# Altium PCB power.PcbDoc
Units mil, origin at the board's own origin, x right, y up, seen from the top; angles counter-clockwise.
Board outline 6000 x 4000 mil, 2 copper layers (Top Layer, Bottom Layer); 12 components, 10 nets, 44 pads, 16 vias.
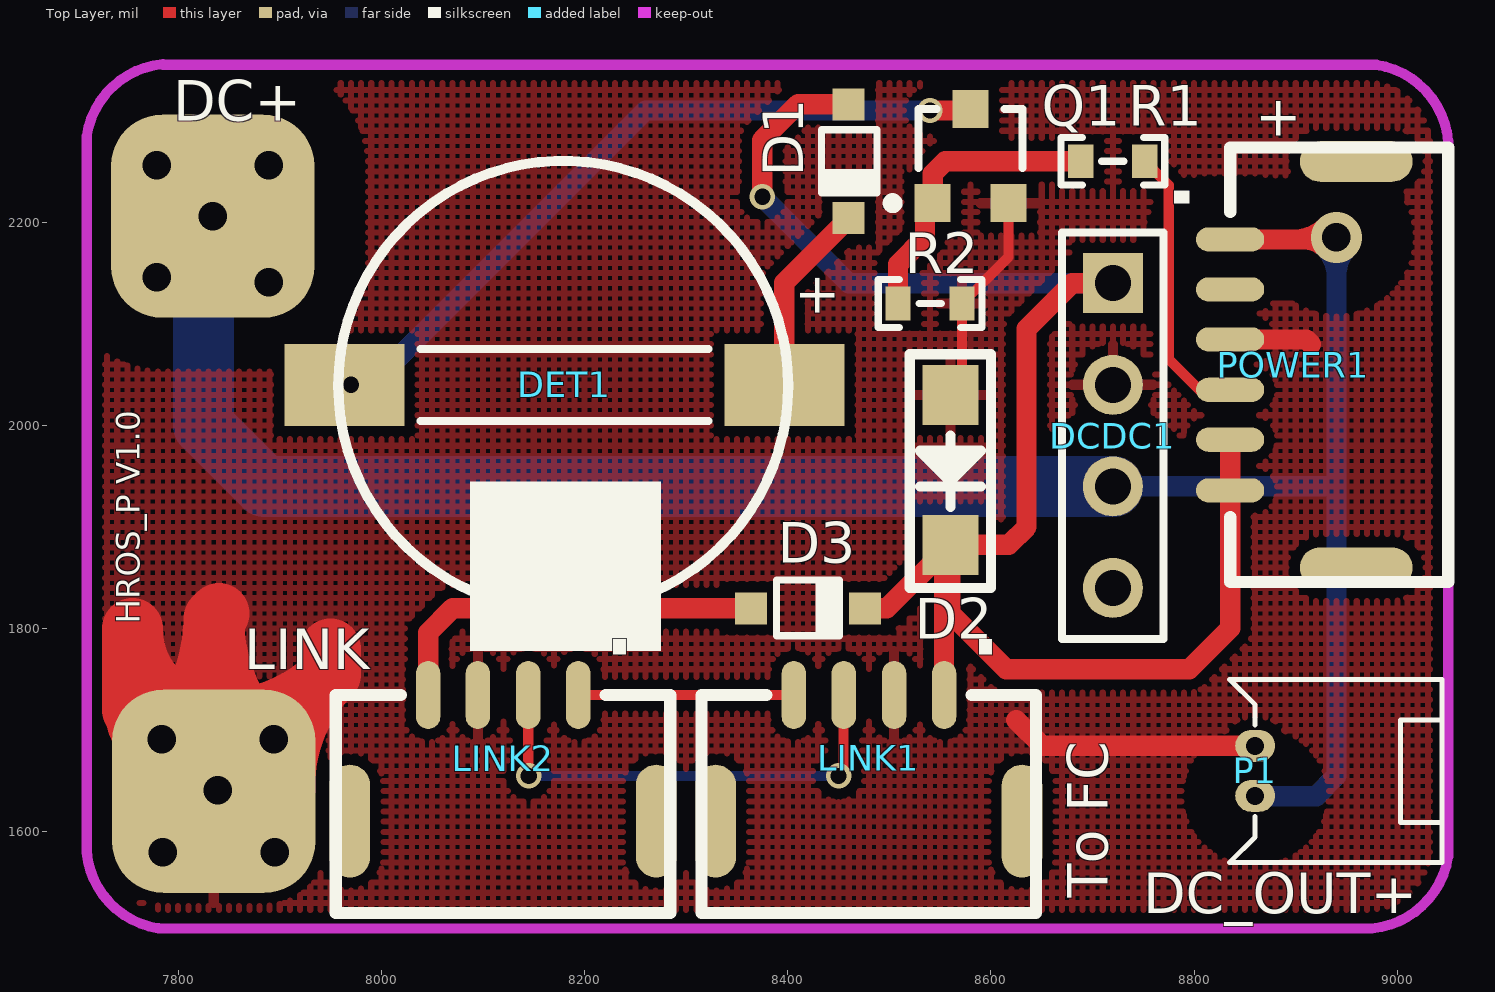
[diagram p0: Top Layer view]
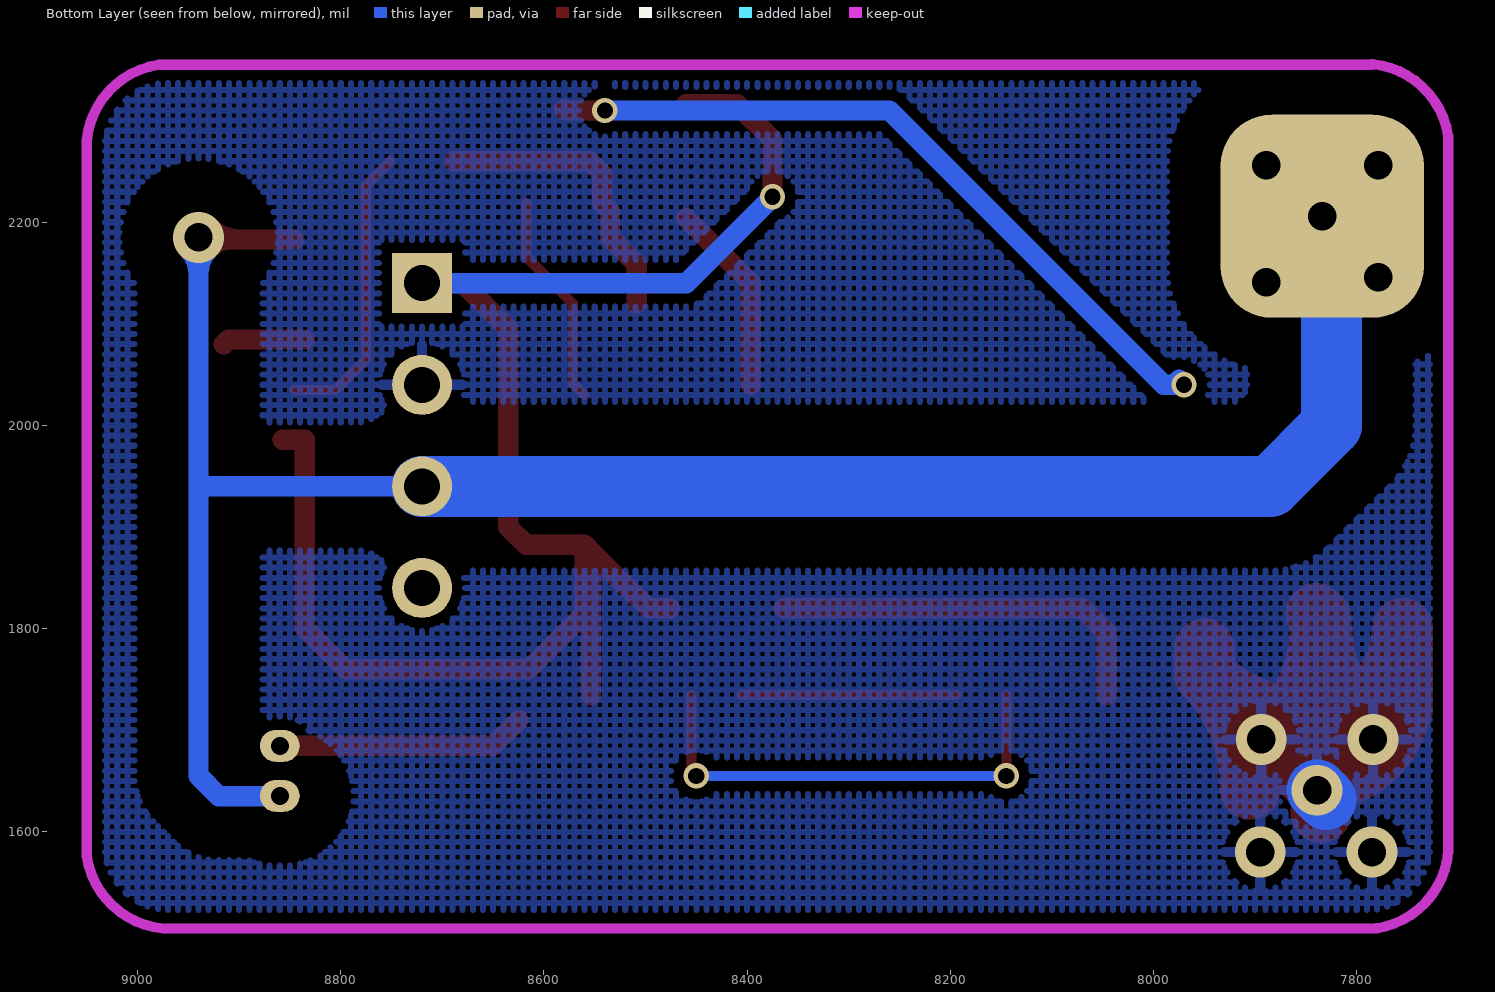
[diagram p1: Bottom Layer view, seen from below]

## Layer stack, top to bottom
Top Layer: signal copper 1.4
Dielectric: dielectric 12.6, FR-4, Dk 4.8
Bottom Layer: signal copper 1.4

## Board outline
1000,1000 7000,1000 7000,5000 1000,5000

## Design rules (kind name [scope] priority, off if disabled: settings)
Clearance Clearance_1 [(InPolygon) vs InNet('DC_POWER')] p1: gap=50
Clearance [All] p2: gap=10
PolygonConnect [All] p1: connectstyle=Relief reliefconductorwidth=10 reliefentries=4 polygonreliefangle="90 Angle"
RoutingVias [All] p1: holewidth=28 width=50 viastyle="Through Hole" minholewidth=16 minwidth=25 maxholewidth=28 maxwidth=50
SilkscreenOverComponentPads [All] p1: minsilkscreentomaskgap=10
SolderMaskExpansion [All] p1: expansion=4
Width [All] p1: maxlimit=60 minlimit=10 preferedwidth=10 minimp=50.000000 maximp=50.000000 favimp=50.000000
27 further rules are at their usual default settings.

## Components (designator, comment, footprint, x,y, rotation, side; value= is the part's Value field where it differs from the comment)
D1 "BAT54WS" SOD-323 8460,2260 r90 top
D2 "IN4733 5.1V" 1n4148-SOD123 8560,2020 r270 top
D3 "BAT54WS" SOD-323 8420,1820 r180 top
DCDC1 "Header 4" HDR1X4 8720,2140 r270 top
DET1 "DET402_1" BEEP 8180,2040 r0 top
LINK1 "Header 4" JST_GH_V4 8480,1520 r180 top
LINK2 "Header 4" JST_GH_V4 8120,1520 r180 top
P1 "HEAD2" HEADER2-1.25MM 8860,1660 r270 top
POWER1 "Header 6" JST_GH_V6 9050,2060 r270 top
Q1 "S8050" SOT-23R 8580,2260 r0 top
R1 "1K" R0603 8720,2260 r0 top
R2 "10K" R0603 8540,2120 r180 top

## Footprints (in the part's own frame and the unit in brackets; to place one, negate y for a bottom-side part, rotate by r counter-clockwise, add the part's x,y. Pads: shape width x height; smd on the part's side, far side on the other; paste and mask are expansions set on the pad)
1n4148-SOD123 [mm]
  rect 1.5x1.4 smd: 1(-0.254,0) 2(3.494,0)
  silkscreen extent -1.27,-1.02 4.57,1.02, body extent -0.25,-0.85 3.6,0.85, height 1.42
BEEP [mm] "Molded Capacitor, 2-Leads, Body 9.3x1.6mm, IPC Medium Density"
  rect 3x2.05 smd: 1(5.5,0) 2(-5.5,0)
  silkscreen extent -5.65,-6.65 5.6,5.59, body extent -4,-0.9 4,0.9, height 1.8
HDR1X4 [mm] "Connector; Header; 4 Position"
  rect 1.5x1.5 hole 0.9: 1(0,0)
  round 1.5 hole 0.9: 2(2.54,0) 3(5.08,0) 4(7.62,0)
  silkscreen extent -1.27,-1.27 8.89,1.27
HEADER2-1.25MM [mm]
  oval 0.8x1 hole 0.45: 1(-0.625,0) 2(0.625,0)
  silkscreen extent -2.29,-0.63 2.29,4.67
JST_GH_V4 [mil]
  rrect100% 24x67 smd: 1(-73.82,-214.57) 2(-24.61,-214.57) 3(25,-214.57) 4(74,-214.57)
  rrect100% 40x111 smd: GND(-150.59,-90.55) GND(151,-90.55)
  silkscreen extent -164,-215 165,0, body extent -162,-235 163,-40, height 165
JST_GH_V6 [mil]
  rrect100% 24x67 smd: 1(-123.03,-214.57) 2(-73.82,-214.57) 3(-24.61,-214.57) 4(25,-214.57) 5(74,-214.57) 6(124,-214.57)
  rrect100% 40x111 smd: GND(-199.8,-90.55) GND(200,-90.55)
  silkscreen extent -214,-215 214,0, body extent -212,-232 212,-37, height 165
R0603 [mil] "ÌùÆ"
  rect 25x33 smd: 1(-31.5,0) 2(31.5,0)
  silkscreen extent -51,-24 51,24, body extent -32,-16 32,16, height 20
SOD-323 [mm]
  rect 0.8x0.8 smd: 1(1.422,0) 2(-1.422,0)
  silkscreen extent -0.79,-0.74 0.79,0.69
SOT-23R [mm]
  rect 0.9x0.95 smd: 1(0.95,-1.048) 2(-0.95,-1.048) 3(0,1.302)
  silkscreen extent -2.07,-1.17 1.3,1.3

## Part data
D1 D3: library part BAT54, "单肖特基二极管"
D2: library part ZENER3, "Zener Diode"
DCDC1 LINK1 LINK2: "Header, 4-Pin"
POWER1: "Header, 6-Pin"
Q1: library part NPN, "8050/BCW846/BCW847"
R1 R2: library part Res2, "0603"

## Free pads (board coordinates)
  rrect50% 200x200 smd: 0(7834,2206) 0(7835,1640)
  rrect50% 200x200 smd far side: 0(7834,2206)

## Via types
v1: diameter 50, hole 28, Top Layer to Bottom Layer, 11 vias
v2: diameter 25, hole 16, Top Layer to Bottom Layer, 5 vias

## Nets (pads, with @x,y where several pads share a name; then routed paths per layer and width w, separated by ;. In a path a pad name is that pad's centre, name@x,y a point inside that pad or via, vN(x,y) a via of type N, cw(c..) or ccw(c..) an arc to the next point about the centre after c; other vN are vias at no path point)
5V: D1.1 D2.2 D3.2 DCDC1.1 LINK1.1 POWER1.5 POWER1.6 | length 1782.8
  Top Layer w20: v2(8375,2225) 8375,2281 8410,2316 D1.1 ; D3.2 8497.56,1820 D2.2@8553.82,1876.26 ; LINK1.1 D2.2@8553.82,1876.26 ; DCDC1.1@8695,2140 DCDC1.1 8680,2140 8635,2095 8635,1900 8617.44,1882.44 D2.2 ; POWER1.5@8857.11,1986 POWER1.5 POWER1.6 8835.43,1800.43 8795,1760 8615,1760 8560,1815 D2.2 ; D2.2@8553.82,1876.26 D2.2
  Bottom Layer w20: v2(8375,2225) 8460,2140 DCDC1.1
BEEP: POWER1.4 R1.2 | length 287.6
  Top Layer w10: R1.2 8775,2236.5 8775,2065 8805,2035 POWER1.4@8845.43,2035
DC_POWER: DCDC1.3 P1.2 pad.0@7834,2206 POWER1.1 | length 2264.7
  Top Layer w20: POWER1.1@8845.43,2183.03 8938.03,2183.03 v1(8940,2185) ; 8899.03,2183.03 ccw(c8899.03,2225.97) v1@8929.39,2195.61 ; 8908.54,2183.03 cw(c8908.54,2153.54) v1@8929.39,2174.39
  Bottom Layer w20: pad.0@7779,2144 v1(7779,2146) ; pad.0@7779,2254 v1(7779,2256) ; pad.0@7834,2204 v1(7834,2206) ; pad.0@7889,2139 v1(7889,2141) ; pad.0@7889,2254 v1(7889,2256) ; DCDC1.3 8750,1940 8940,1940 ; P1.2 8860.39,1635 8920,1635 8940,1655 8940,1940 ; v1@8929.39,2174.39 cw(c8903.79,2148.79) 8940,2148.79 cw(c8976.21,2148.79) v1@8950.61,2174.39 ; v1(8940,2185) 8940,1940
  Bottom Layer w60: pad.0@7780.07,2141.12 ccw(c7767.78,2197) pad.0@7825,2197 ; v1(7834,2206) pad.0@7825,2197 ; DCDC1.3 7885,1940 7825,2000 pad.0@7825,2197
GND: D2.1 DCDC1.2 LINK1.2 LINK2.3 P1.1 pad.0@7835,1640 POWER1.3 Q1.1 R2.1 | length 2193.2
  Top Layer w10: D2.1 8571.5,2041.5 R2.1 8617.4,2165.9 Q1.1
  Top Layer w20: 8625,1710 8650.39,1684.61 P1.1 ; POWER1.3 8910.39,2084.61 8915,2080
  Top Layer w60: 7755,1736 ccw(c7841.2,1736) pad.0@7835.64,1649.98 ; 7755,1748.94 ccw(c7841.94,1748.94) pad.0@7780.46,1687.46 ; pad.0@7785.5,1689.5 ccw(c7666.01,1808.99) 7835,1808.99 ccw(c8003.99,1808.99) pad.0@7884.5,1689.5 ; pad.0@7786.11,1695.53 cw(c7750.46,1618.88) pad.0@7835,1618.88 ; pad.0@7787.54,1687.46 ccw(c7672.95,1802.05) 7835,1802.05 ; pad.0@7836.93,1709.97 ccw(c7841.17,1863.82) 7949.99,1754.99 ; pad.0@7839.51,1709.85 cw(c7845.33,1800) 7755,1800 7755,1720 pad.0@7835,1640 ; 7840,1815 7835,1810 pad.0@7835,1640 ; pad.0@7904.97,1641.93 cw(c8058.82,1646.17) 7949.99,1754.99 ; 7950,1780 7950,1755 ; pad.0@7835,1640 7950,1755
  Bottom Layer w20: v1@7784,1689 v1(7784,1691) ; v1@7785,1578 v1(7785,1580) ; v1@7839,1639 v1(7839,1641) ; v1@7894,1689 v1(7894,1691) ; v1@7895,1578 v1(7895,1580)
  Bottom Layer w60: v1@7830,1632 v1(7839,1641)
NetD1_2: D1.2 DET1.1 | length 190.3
  Top Layer w20: DET1.1 8396.54,2140.54 D1.2
NetD3_1: D3.1 LINK2.4 | length 389.4
  Top Layer w20: LINK2.4 8046,1796 8070,1820 D3.1
NetDET1_2: DET1.2 Q1.3 | length 729.4
  Top Layer w20: v2(8540,2310) 8578.74,2310 Q1.3
  Bottom Layer w20: v2@7975,2045 v2(7970,2040) 7990,2040 8260,2310 8430,2310 v2(8540,2310)
NetQ1_2: Q1.2 R1.1 R2.2 | length 292.8
  Top Layer w20: R2.2 8508.5,2158.5 8535,2185 8535,2211.14 Q1.2 8542.6,2247.6 8555,2260 R1.1
UART2_R_1: LINK1.3 LINK2.2 | length 466.4
  Top Layer w10: LINK2.2 8144.61,1655.39 v2(8145,1655) ; v2(8450,1655) 8455,1660 LINK1.3
  Bottom Layer w10: v2(8145,1655) v2(8450,1655)
UART2_T_1: LINK1.4 LINK2.1 | length 212.2
  Top Layer w10: LINK2.1 LINK1.4
pads on no net: DCDC1.4 LINK1.GND LINK2.GND POWER1.2 POWER1.GND

## Polygon pours and split planes (outlines as drawn)
GND on Bottom Layer "Keep-Out Layer-No Net" (hatched 90Degree grid 10 track 6, remove dead copper): 7715,2425 7685,2395 7685,1430 9135,1430 9160,1405 9115,1450 9115,2460
GND on Top Layer "Keep-Out Layer-No Net" (hatched 90Degree grid 10 track 6, remove dead copper): 7660,2415.35 7660,1550.35 7625,1515.35 7650,1490.35 9045,1490.35 9045,2425.35 9050,2430.35

## Keep-outs
Keep-Out Layer:
  lines w10: 7780.6,1505 8975,1505 ccw(c8967.45,1588.1) 9049.95,1575.6 ; 7780.6,1505.05 cw(c7793.1,1587.55) 7710,1580 7710,2285 cw(c7792.5,2272.5) 7784.95,2355.6 ; 7784.95,2355 8979.4,2355 ; 8979.4,2354.95 cw(c8966.9,2272.45) 9050,2280 9050,1575.6

## Silkscreen, mask and mechanical layers (free items; w line width, h text height)
Top Overlay:
  text "DC+" at 7795,2300 h40
  text "+" at 8860,2285 h40
  text "HROS_P V1.0" at 7770,1805 h40 r90
  text "LINK" at 7865,1760 h40
  text "To FC" at 8715,1535 h40 r90
  text "DC_OUT+" at 8750,1520 h40

## Text inside footprints (layer, text, board x,y; h text height)
DET1: Top Overlay "+" at 8446,2105 h40 r90